# Altium PCB PCB_STM.PcbDoc (part 2 of 2)
Units mm, origin at the board's own origin, x right, y up, seen from the top; angles counter-clockwise.
Board outline 70.6 x 41.2 mm, 2 copper layers (Top Layer, Bottom Layer), stack 1.569 mm thick; 46 components, 35 nets, 243 pads, 370 vias.
Unrouted connection lines stored in the file: 46.
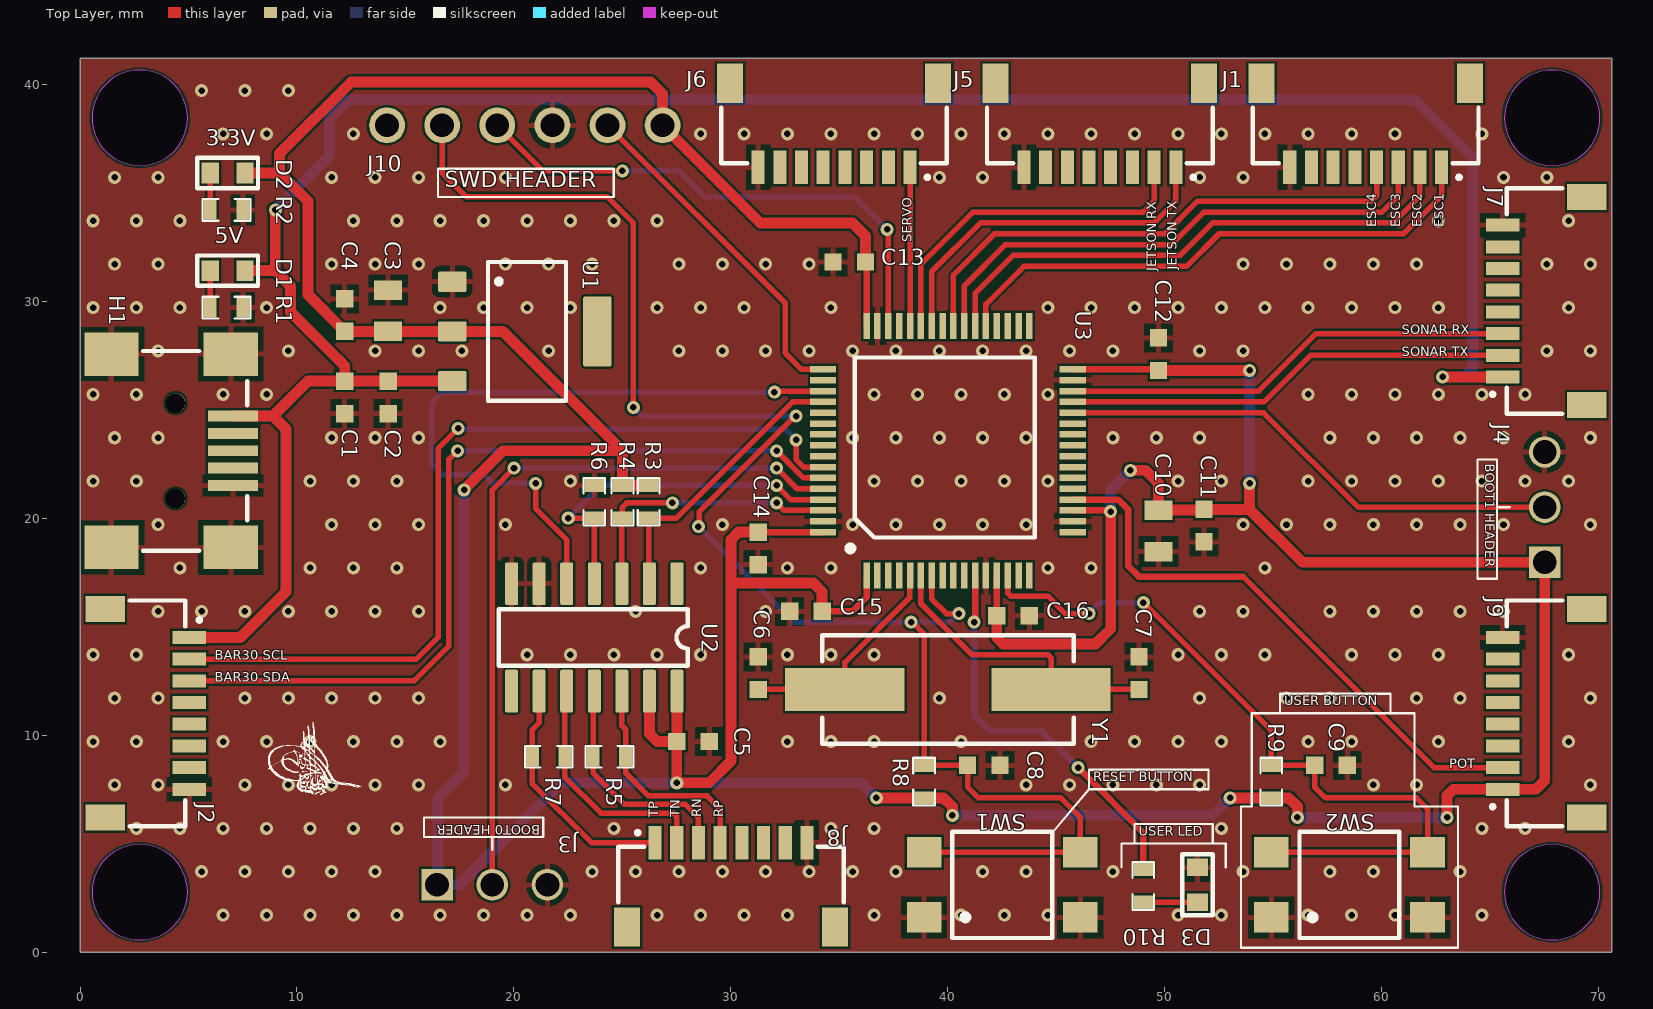
[diagram p0: Top Layer view]

## Silkscreen, mask and mechanical layers (free items; w line width, h text height) (continued)
Top Overlay: (continued)
  text "ESC2" at 62,33.4 h0.75 r90
  text "ESC1" at 63,33.4 h0.75 r90
  text "SERVO" at 38.5,32.7 h0.75 r90
  text "5V" at 6.2,32.4 h1.25
  text "JETSON TX" at 50.7,31.441 h0.75 r90
  text "JETSON RX" at 49.766,31.381 h0.75 r90
  text "SONAR RX" at 60.9,28.3 h0.75
  text "SONAR TX" at 60.9,27.3 h0.75
  text "BOOT1 HEADER" at 64.6,22.5 h0.75 r270
  text "BAR30 SCL" at 6.2,13.3 h0.75
  text "BAR30 SDA" at 6.2,12.3 h0.75
  text "USER BUTTON" at 55.5,11.2 h0.75
  text "POT" at 63.1,8.3 h0.75
  text "RESET BUTTON" at 46.7,7.7 h0.75
  text "TP" at 26.8,6.2 h0.75 r90
  text "TN" at 27.8,6.2 h0.75 r90
  text "RN" at 28.8,6.2 h0.75 r90
  text "RP" at 29.8,6.2 h0.75 r90
  text "BOOT0 HEADER" at 21.2,6 h0.75 r180
  text "USER LED" at 48.8,5.2 h0.75